# Altium PCB 变焦摄像头v2.0.PcbDoc
Units mil, origin at the board's own origin, x right, y up, seen from the top; angles counter-clockwise.
Board outline 1500 x 1500 mil, 2 copper layers (Top Layer, Bottom Layer); 28 components, 37 nets, 132 pads, 26 vias.
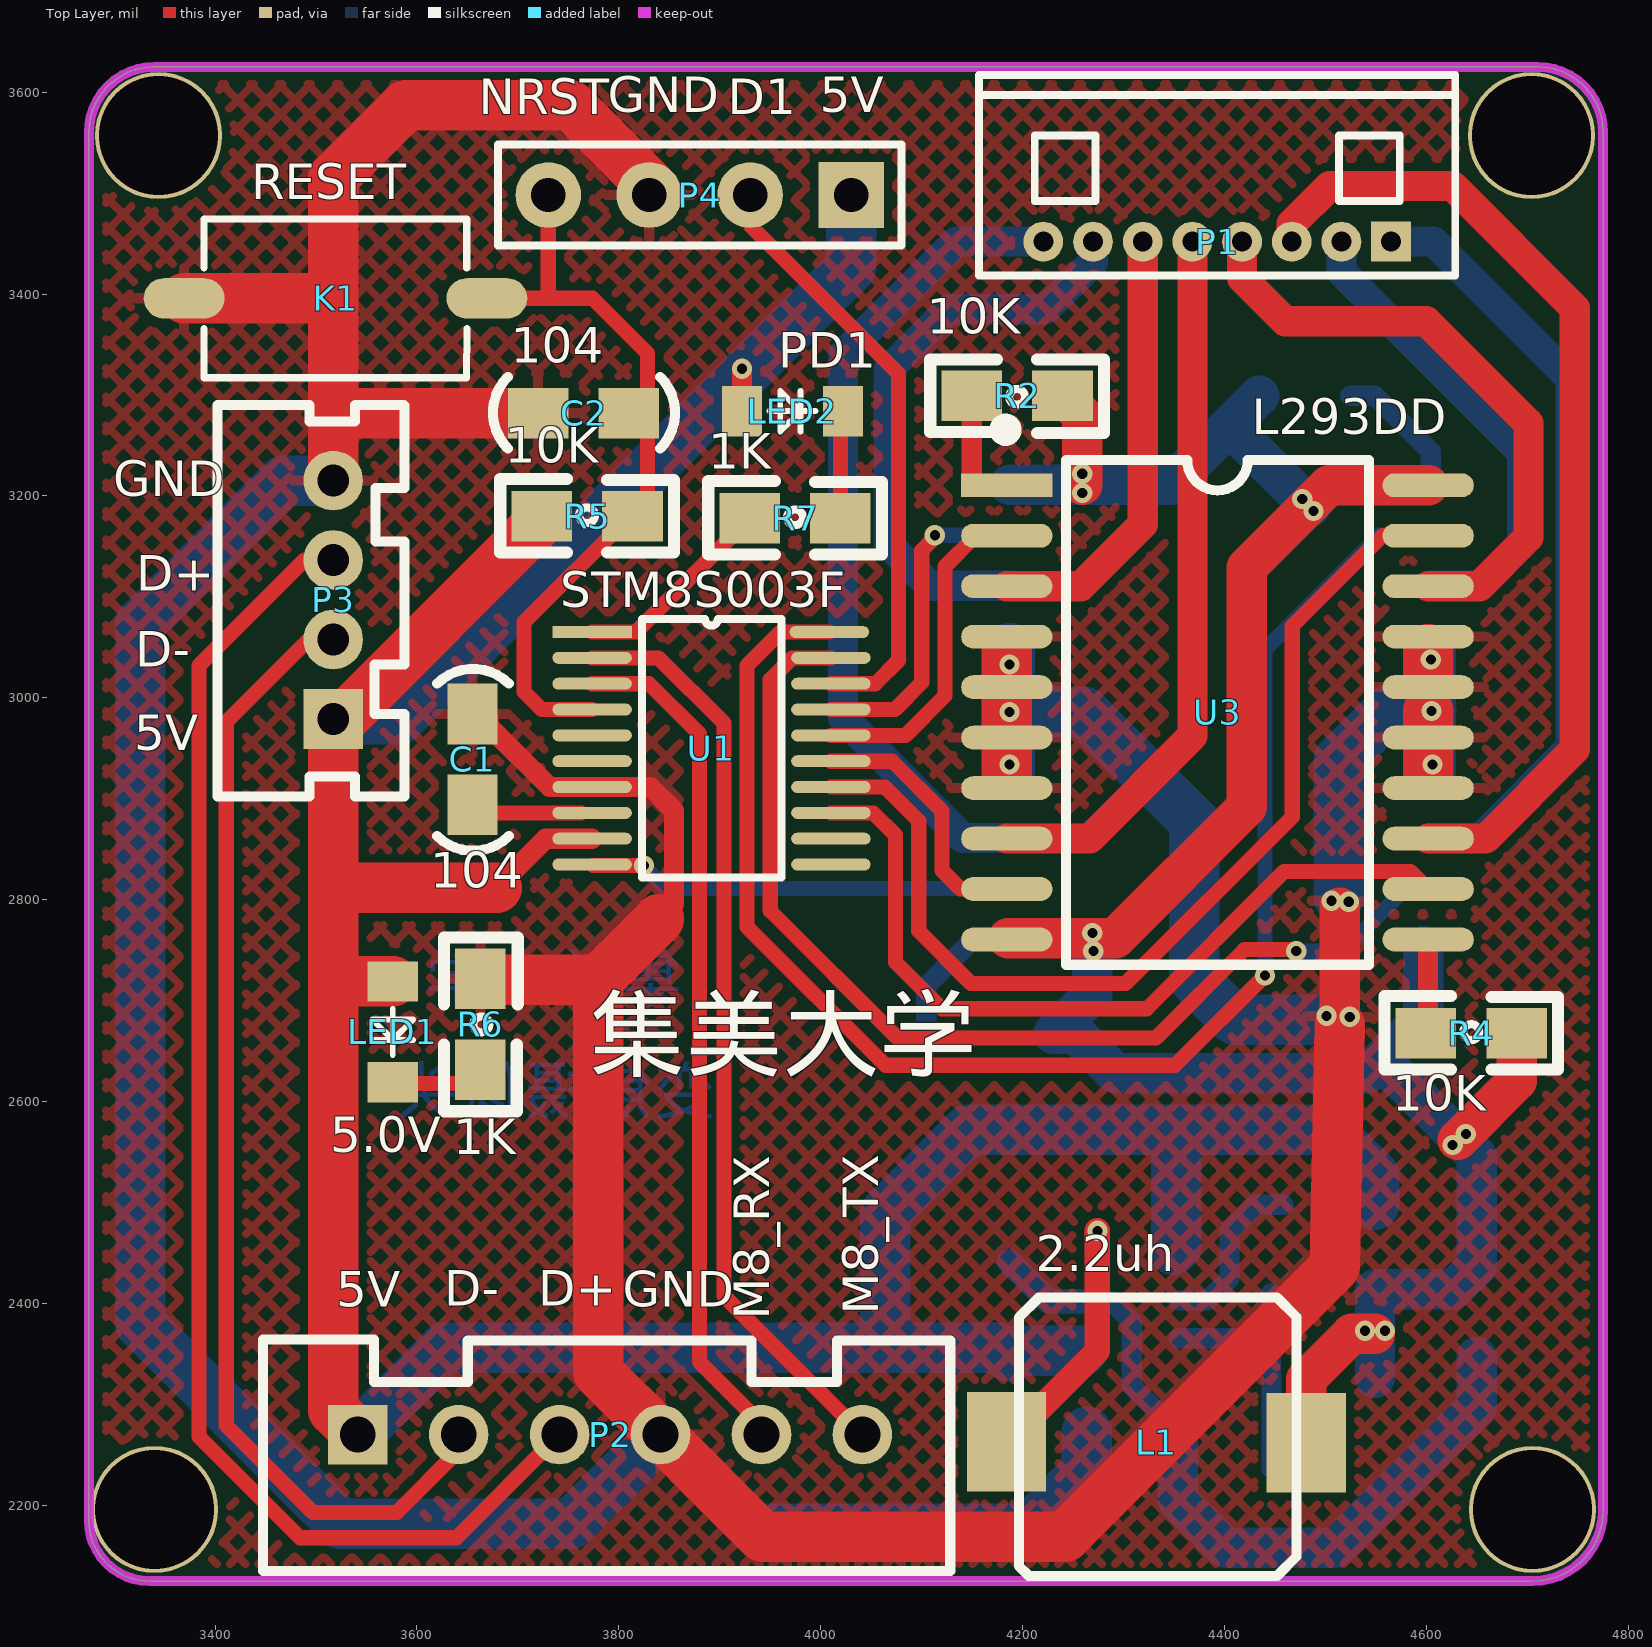
[diagram p0: Top Layer view]
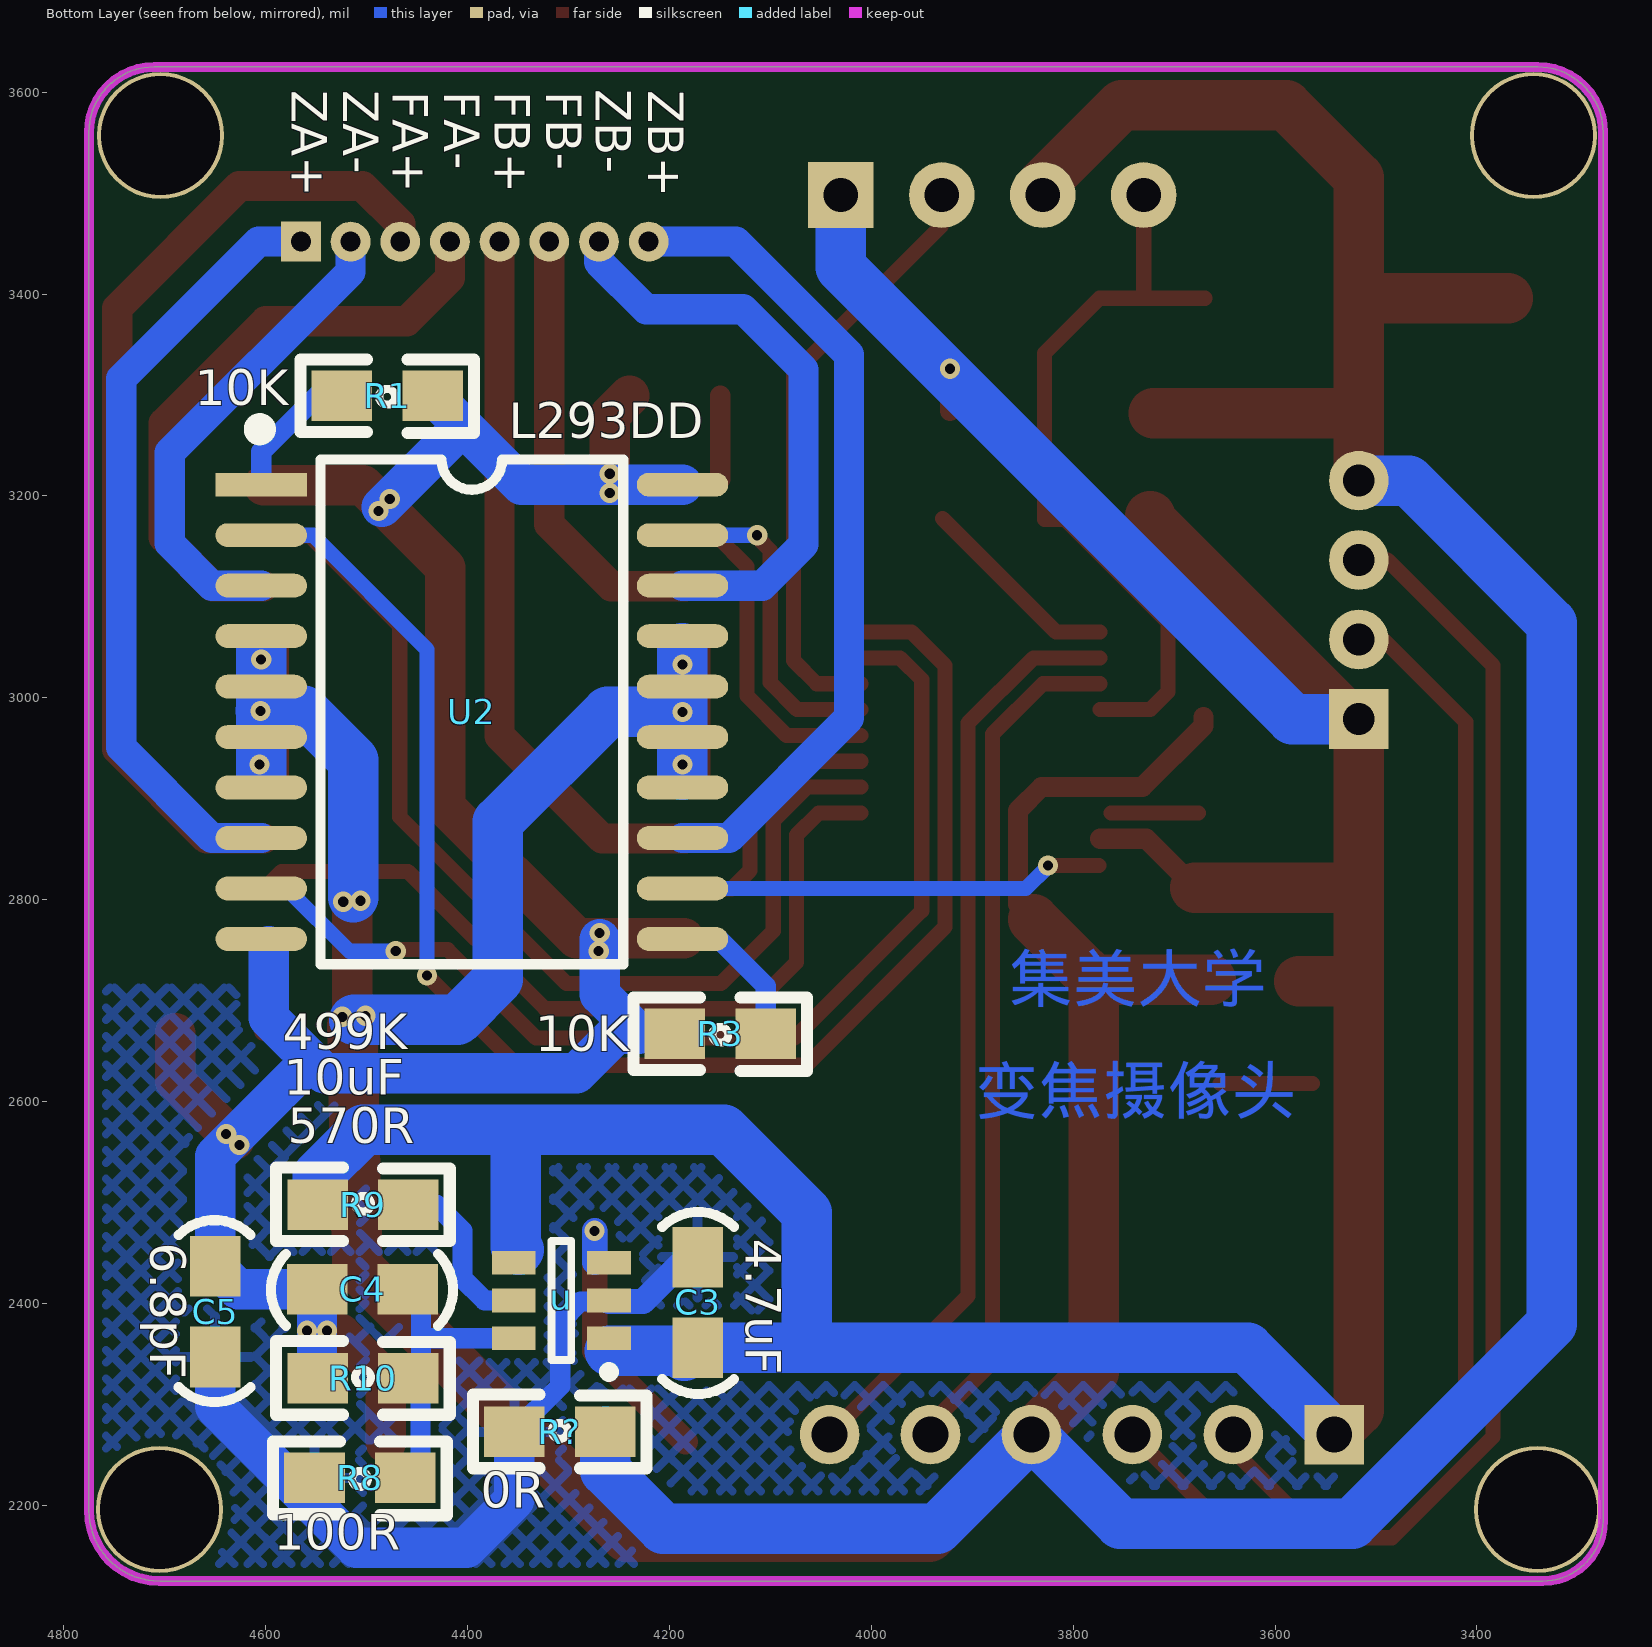
[diagram p1: Bottom Layer view, seen from below]
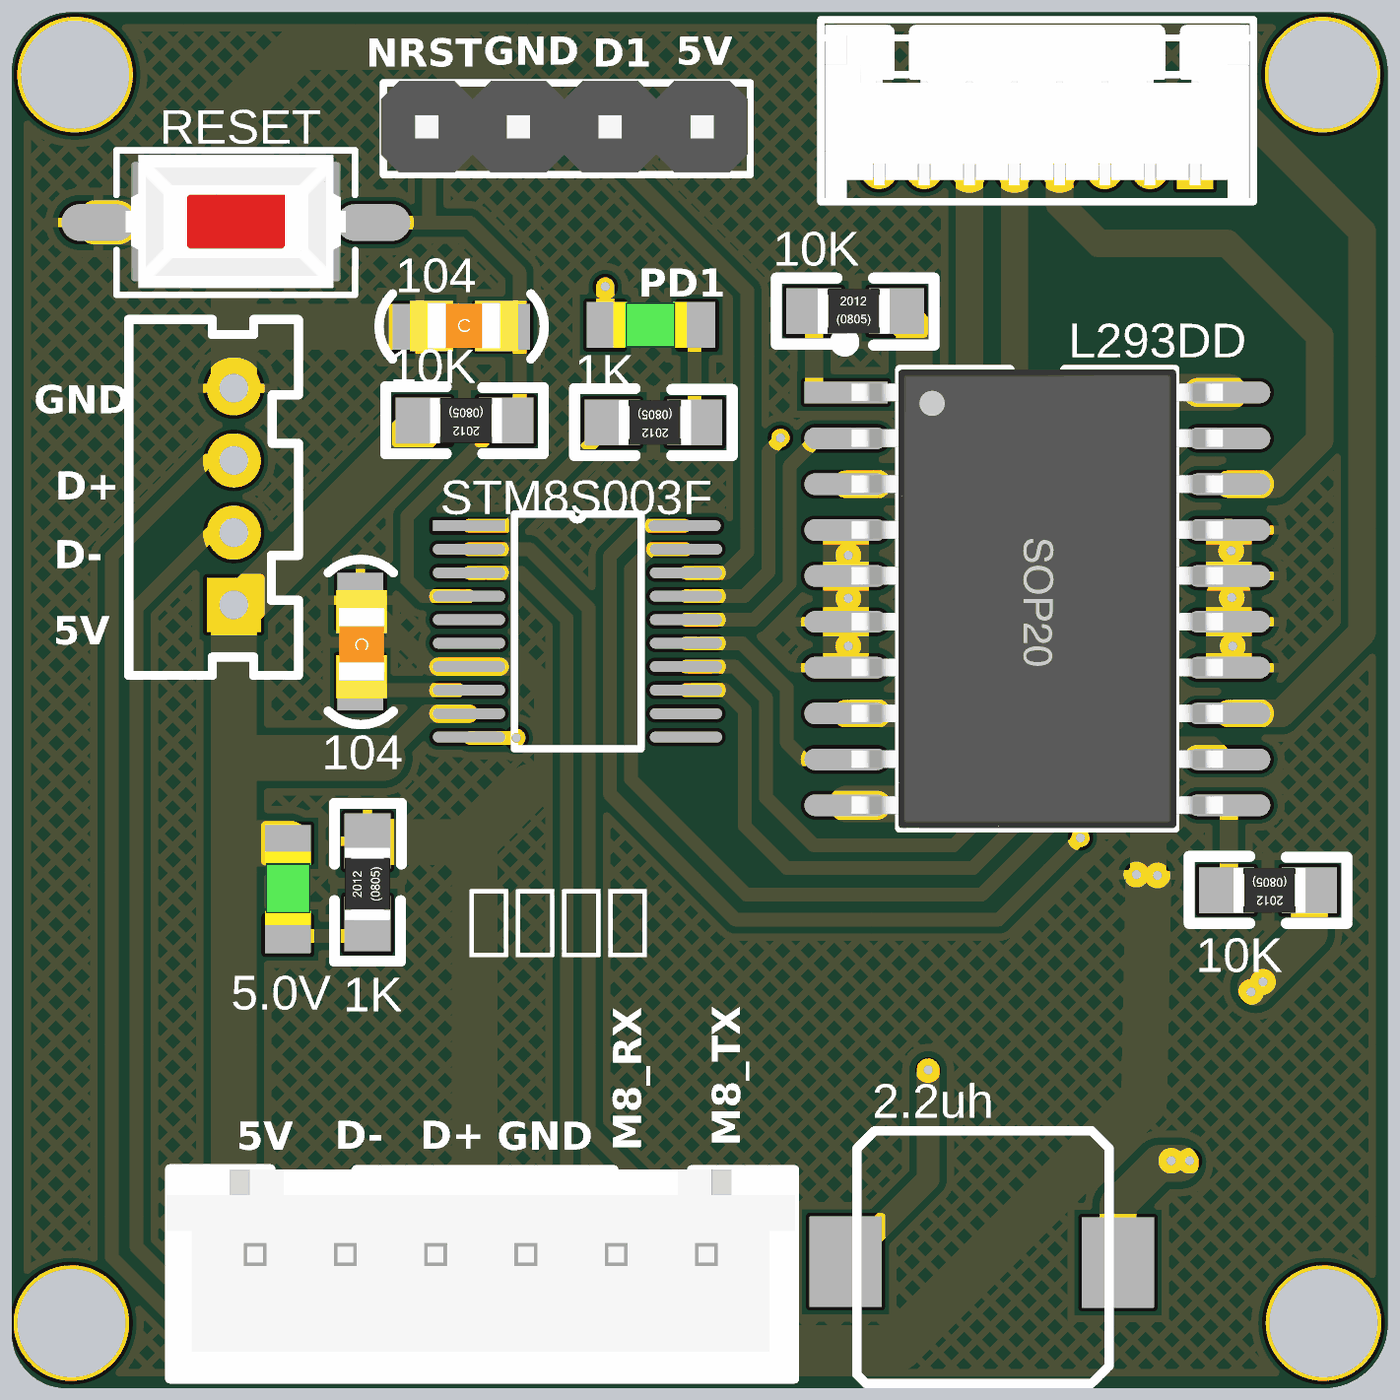
[diagram p2: 3D render of the assembled board from above, using the file's embedded part models]
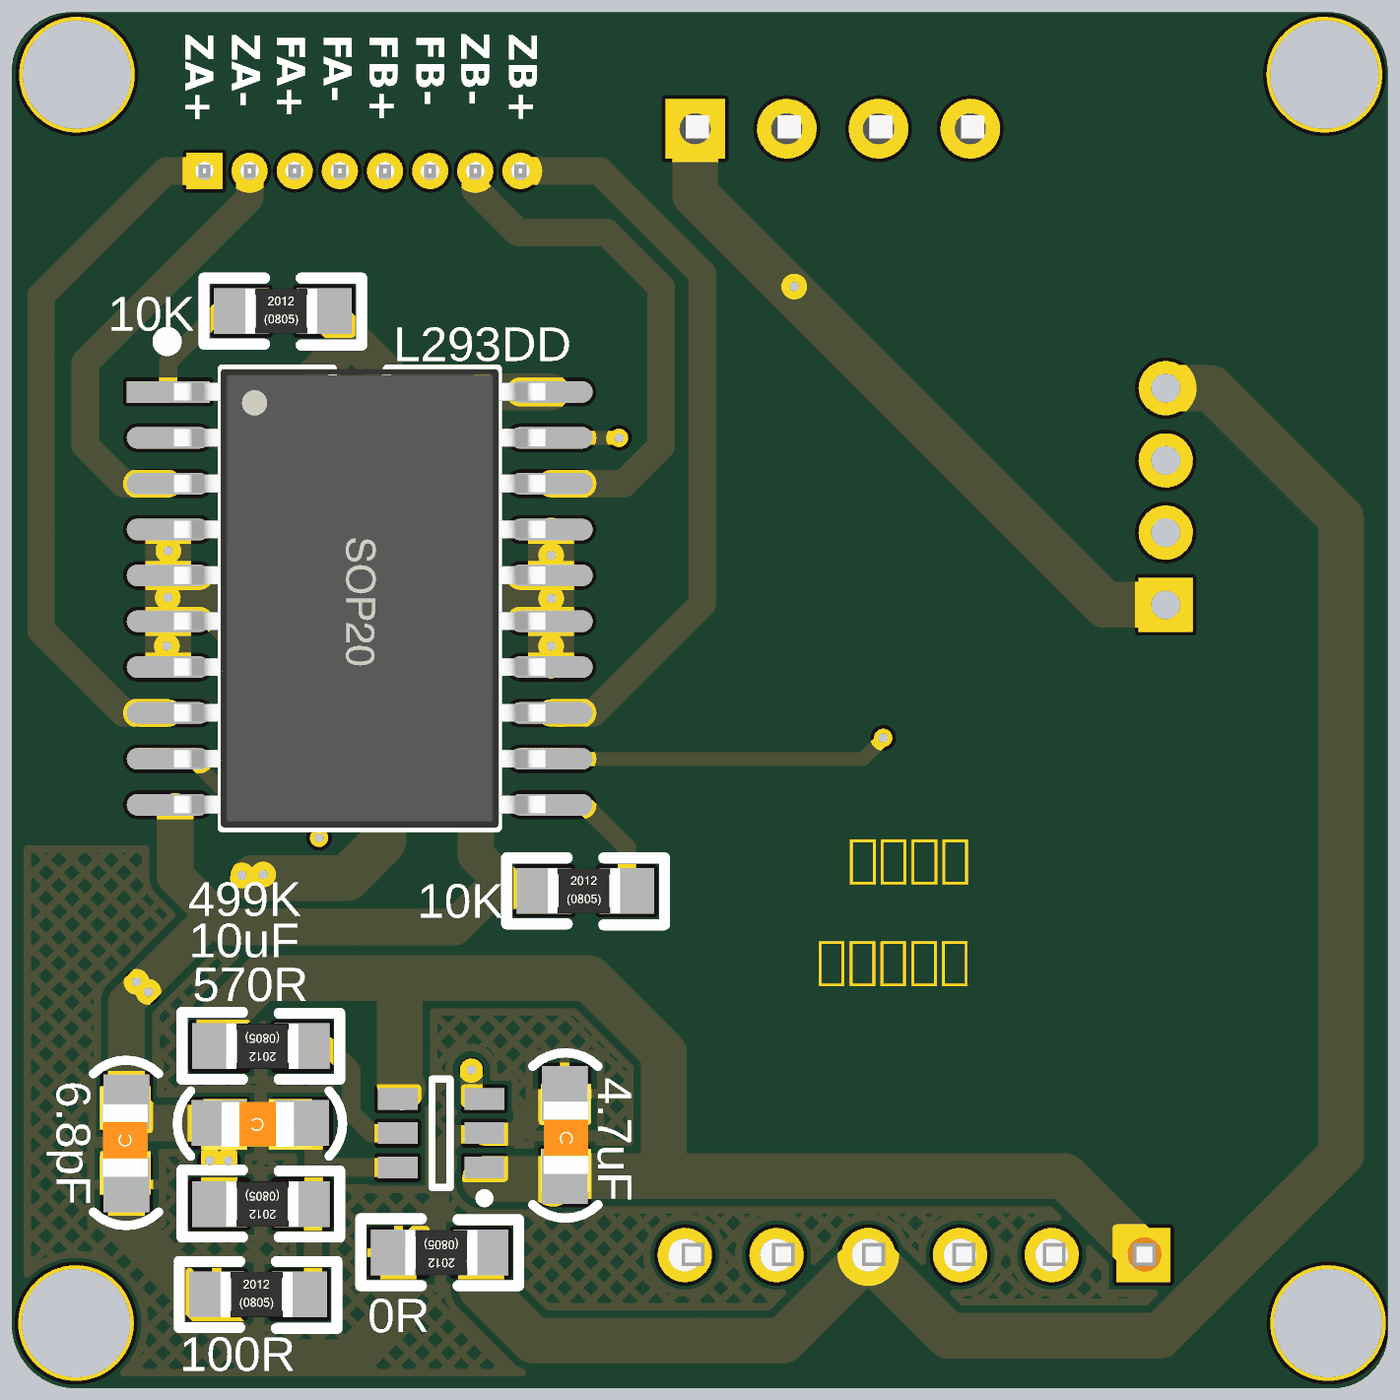
[diagram p3: 3D render of the assembled board from below, using the file's embedded part models]

## Layer stack, top to bottom
Top Solder: solder mask 0.4, Solder Resist, Dk 3.5
Top Layer: signal copper 1.4
Dielectric 1: dielectric 12.6, FR-4, Dk 4.8
Bottom Layer: signal copper 1.4
Bottom Solder: solder mask 0.4, Solder Resist, Dk 3.5

## Board outline
3275,2185 ccw(c3335,2185) 3335,2125 4705,2125 ccw(c4705,2195) 4775,2195 4775,3560 ccw(c4710,3560) 4710,3625 3340,3625 ccw(c3340,3560) 3275,3560

## Design rules (kind name [scope] priority, off if disabled: settings)
Clearance [All] p1: gap=8
PolygonConnect [All] p1: connectstyle=Relief reliefconductorwidth=10 reliefentries=4 polygonreliefangle="90 Angle" airgapwidth=10
RoutingVias [All] p1: holewidth=28 width=50 viastyle="Through Hole" minholewidth=28 minwidth=50 maxholewidth=28 maxwidth=50
SolderMaskExpansion [All] p1: expansion=4
Width [All] p1: maxlimit=100 minlimit=10 preferedwidth=15 minimp=50.000000 maximp=50.000000 favimp=50.000000
30 further rules are at their usual default settings.

## Components (designator, comment, footprint, x,y, rotation, side; value= is the part's Value field where it differs from the comment)
C1 "104" 0805c 3655,2979 r270 top
C2 "104" 0805c 3725,3282 r0 top
C3 "4.7uF" 0805C 4172,2441 r270 bottom
C4 "10uF" 0805C 4464,2414 r0 bottom
C5 "6.8pF" 0805C 4650,2352 r90 bottom
K1 "RESET" 贴片按键 3375,3393 r0 top
L1 "2.2uh" 电感（220uh） 4334,2268 r0 top
LED1 "5.0V" 0805LED 3578,2717 r270 top
LED2 "RED" 0805LED 3924,3286 r0 top
P1 "接线端子-8PIN" MX1.25MM-8P 4565,3450 r180 top
P2 "6PIN" XH2.54-6P 3542,2271 r0 top
P3 "4PIN" PH2.0-4 3517,2979 r90 top
P4 "下载口" "Header 4" 4031,3499 r270 top
R1 "10K" 0805R 4520,3298 r180 bottom
R2 "10K" 0805R 4154,3298 r0 top
R3 "10K" 0805R 4190,2666 r180 bottom
R4 "10K" 0805R 4685,2669 r180 top
R5 "10K" 0805R 3809,3181 r180 top
R6 "1K" 0805R 3664,2636 r90 top
R7 "1K" 0805R 4015,3179 r180 top
R8 "100R" 0805R 4547,2226 r180 bottom
R9 "499K" 0805R 4463,2499 r0 bottom
R10 "570R" 0805R 4463,2327 r0 bottom
R? "0R" 0805R 4268,2274 r0 bottom
u "TLV62568P" TSOT23-6 4261,2366 r0 bottom
U1 "STM8S003F" STM8_SOP20 3774,3065 r0 top
U2 "L293DD" SOP-20M 4601.69,3210.55 r180 bottom
U3 "L293DD" SOP-20M 4187,3210 r0 top

## Footprints (in the part's own frame and the unit in brackets; to place one, negate y for a bottom-side part, rotate by r counter-clockwise, add the part's x,y. Pads: shape width x height; smd on the part's side, far side on the other; paste and mask are expansions set on the pad)
0805c [mil]
  rect 60x50 smd: 1(-5,0) 2(85,0)
  silkscreen extent -50,-35 131,36, body extent -16,-26 102,29, height 37
0805C [mil]
  rect 60x50 smd: 1(-5,0) 2(85,0)
  silkscreen extent -50,-35 131,36, body extent -16,-26 102,29, height 37
0805LED [mil]
  rect 40x50 smd: 1(-2,-2) 2(98,-2)
  silkscreen extent 25,-22 71,18, body extent 7,-27 87,23, height 43
0805R [mil]
  rect 60x50 smd: 1(-4.51,1.2) 2(85.49,1.2)
  silkscreen extent -46,-36 126,37, body extent -1,-23 78,26, height 18
"Header 4" [mil]
  rect 65x65 hole 34: 1(0.95,-0.93)
  round 65 hole 34: 2(0.95,-100.93) 3(0.95,-200.93) 4(0.95,-300.93)
  silkscreen extent -49,-351 51,49, body extent -51,-354 49,46, height 336
MX1.25MM-8P [mm]
  rect 1x1 hole 0.5: 1(0,-0.05)
  round 1 hole 0.5: 2(1.25,-0.05) 3(2.5,-0.05) 4(3.75,-0.05) 5(5,-0.05) 6(6.25,-0.05) 7(7.5,-0.05) 8(8.75,-0.05)
  silkscreen extent -1.61,-4.24 10.36,0.8, body extent -1.5,-4.1 10.25,0.8, height 3.35
PH2.0-4 [mm]
  rect 1.5x1.5 hole 0.8: 1(0,0)
  round 1.5 hole 0.8: 2(2,0) 3(4,0) 4(6,0)
  silkscreen extent -1.95,-1.79 7.9,2.91
SOP-20M [mm]
  rect 2.3x0.6 smd: 1(-0.067,0.014)
  oval 2.3x0.6 smd: 2(-0.067,-1.256) 3(-0.067,-2.526) 4(-0.067,-3.796) 5(-0.067,-5.066) 6(-0.067,-6.336) 7(-0.067,-7.606) 8(-0.067,-8.876) 9(-0.067,-10.146) 10(-0.067,-11.416) 11(10.533,-11.416) 12(10.533,-10.146) 13(10.533,-8.876) 14(10.533,-7.606) 15(10.533,-6.336) 16(10.533,-5.066) 17(10.533,-3.796) 18(10.533,-2.526) 19(10.533,-1.256) 20(10.533,0.014)
  silkscreen extent -0.26,-12.05 9.04,1.57, body extent 0.08,-12.05 10.39,0.65, height 2.7
STM8_SOP20 [mm]
  rect 2x0.3 smd: 1(-0.014,0.005)
  oval 2x0.3 smd: 2(-0.014,-0.645) 3(-0.014,-1.295) 4(-0.014,-1.945) 5(-0.014,-2.595) 6(-0.014,-3.245) 7(-0.014,-3.895) 8(-0.014,-4.545) 9(-0.014,-5.195) 10(-0.014,-5.845) 11(5.994,-5.845) 12(5.994,-5.195) 13(5.994,-4.545) 14(5.994,-3.895) 15(5.994,-3.245) 16(5.994,-2.595) 17(5.994,-1.945) 18(5.994,-1.295) 19(5.994,-0.645) 20(5.955,0.005)
  silkscreen extent 1.24,-6.17 4.75,0.33, body extent -0.16,-6.27 6.12,0.23, height 1.1
TSOT23-6 [mm]
  rect 1.1x0.6 smd: 1(-0.032,0.01) 2(-0.032,-0.94) 3(-0.032,-1.89) 4(2.368,-1.89) 5(2.368,-0.94) 6(2.368,0.01)
  silkscreen extent -0.16,-2.44 1.42,0.99, body extent 0.29,-2.44 2.04,0.56, height 1.45
XH2.54-6P [mm]
  rect 1.5x1.5 hole 0.9: 1(-0.018,-0.022)
  round 1.5 hole 0.9: 2(2.522,-0.022) 3(5.062,-0.022) 4(7.602,-0.022) 5(10.142,-0.022) 6(12.682,-0.022)
  silkscreen extent -2.41,-3.45 14.89,2.37, body extent -2.5,-3.4 14.9,2.35, height 7
电感（220uh） [mm]
  rect 2x2.5 smd: 1(-3.81,-0.127) 2(3.734,-0.152)
  silkscreen extent -3.5,-3.5 3.48,3.5
贴片按键 [mil]
  oval 80x40 smd: 1(-5.71,2.8) 2(294.29,2.8)
  silkscreen extent 14,-76 274,82, body extent 24,-69 264,77, height 98

## Part data
C1 C2: library part "Cap Semi", "Capacitor (Semiconductor SIM Model)"
C3 C4 C5: library part Cap1, "无极贴片电容"
K1: library part K_Press, "贴片按键"
L1: library part "电感 220uh", "7*7*4"
LED1 LED2: library part LED, "发光二极管"
P2: library part 接线端子-6PIN
P3: library part 接线端子-4PIN
P4: library part "Header 4", "Header, 4-Pin"
R1 R2 R3 R4 R6 R7 R8 R9 R10 R?: library part Res, "电阻"
R5: library part Res2, "Resistor"
U1: library part Component_1
U2 U3: library part L293D

## Free pads (board coordinates)
  round 125.98 hole 118.11: 2(3340,2196) 2(3344,3557) 2(4704,3557) 2(4705,2196)

## Via types
v1: diameter 20, hole 10, Top Layer to Bottom Layer, 26 vias

## Nets (pads, with @x,y where several pads share a name; then routed paths per layer and width w, separated by ;. In a path a pad name is that pad's centre, name@x,y a point inside that pad or via, vN(x,y) a via of type N, cw(c..) or ccw(c..) an arc to the next point about the centre after c; other vN are vias at no path point)
4.0V: C4.2 C5.2 L1.2 R1.2 R2.2 R3.1 R4.1 R10.2 U2.10 U2.20 U3.10 U3.20 | length 2535.6
  Top Layer w40: U3.10@4185.81,2762 4288,2762 ; R2.2 4259,3279.69 v1@4259,3211 ; 4292,2762 4422,2892 4422,3129 4503.55,3210.55 U3.20 ; L1.2 4481,2325 4526.15,2370.15 4549,2370.15 ; v1@4631,2562 4689.51,2620.51 R4.1
  Bottom Layer w40: U2.20 4346.41,3211.1 R1.2 ; v1@4269,2761 4269,2706.2 4230,2667.2 4252.8,2667.2 4292,2628 4542,2628 4597,2683 U2.10@4597,2753.78 ; 4406.65,3267.35 v1@4485,3189 ; R10.2@4549,2326.31 C4.2 4627,2414 C5.2 4650,2546 4555,2641
  other v1: 4539,2373 4559,2373 4626,2557 4639,2568 4270,2749 4269,2767 4488,3185 4477,3197 4259,3203 4259,3222
5.0V: C3.2 LED1.1 LED2.1 P2.1 P3.1 P4.1 R5.2 R9.2 U1.9 u.1 u.4 | length 3724.6
  Top Layer w20: 3679,2812 3727.46,2860.46 U1.9 ; LED2.1 v1(3922,3326)
  Top Layer w50: 3518,2719 LED1.1 ; P2.1 3517,2294.42 3517,2812 ; 3679,2812 3517,2812 ; R5.2 3723.51,3175.82 3526.69,2979 P3.1 3517,2812
  Bottom Layer w50: P3.1@3526.69,2979 3582.72,2979 4030.07,3426.36 P4.1 ; P2.1 3627.13,2356 4064,2356 ; C3.2@4185,2348 4177,2356 C3.2 4064,2356 ; C3.2@4185,2353 4259,2353 ; 4349,2453.06 4352,2456.06 4352,2572 ; R9.2 4548.49,2526.51 4503,2572 4352,2572 ; 4064,2356 4064,2490 4146,2572 4352,2572
AGND: C3.1 C5.1 R8.1 R?.2 u.2 | length 764
  Bottom Layer w20: u.2@4259.76,2402 4288,2402 4308,2382 4308,2318.28 R?.2
  Bottom Layer w25: C3.1@4187,2441 4226,2402 u.2@4259.76,2402
  Bottom Layer w40: R?.2 4353.49,2205.51 4401,2158 4510,2158 4650,2298 C5.1
"CAMERA USB_D+": P2.3 P3.3 | length 1381.3
  Top Layer w15: P3.3 3488.48,3136.48 3384,3032 3384,2268 3484,2168 3639.13,2168 P2.3
"CAMERA USB_D-": P2.2 P3.2 | length 1144
  Top Layer w15: P3.2 3492.74,3057.74 3411,2976 3411,2279 3497,2193 3580,2193 3641.28,2254.28 P2.2
D1: P4.2 U1.18 | length 598
  Top Layer w15: P4.2@3931.07,3498.05 3931.07,3466.93 4077,3321 4077,3037 4054,3014 U1.18
D4: R7.2 U1.1 | length 202.7
  Top Layer w15: U1.1 3816.9,3065.18 R7.2
FOCUS_A+: P1.3 U3.13 | length 982.6
  Top Layer w30: P1.3 4466.57,3469.57 4504,3507 4626,3507 4747,3386 4747,2949 4658.55,2860.55 U3.13
FOCUS_A-: P1.4 U3.18 | length 611.7
  Top Layer w30: P1.4 4417.36,3415.81 4460.17,3373 4600,3373 4701,3272 4701,3159 4652.55,3110.55 U3.18
FOCUS_B+: P1.5 U3.8 | length 715.7
  Top Layer w30: U3.8 4266.55,2860.55 4368.15,2962.15 P1.5
FOCUS_B-: P1.6 U3.3 | length 440
  Top Layer w30: U3.3 4257.55,3110.55 4318.94,3171.94 P1.6
GND: C1.1 C2.1 K1.1 P2.4 P3.4 P4.3 R6.2 R?.1 U1.7 U2.4 U2.5 U2.6 U2.7 U2.14 U2.15 U2.16 U2.17 U3.4 U3.5 U3.6 U3.7 U3.14 U3.15 U3.16 U3.17 | length 6587.3
  Top Layer w20: C1.1@3671,2981 3671,2972 3731.36,2911.64 U1.7 3831.36,2911.64 3854.5,2888.5 3854.5,2795.5 3839.5,2780.5 ; 3779.49,2720.49 3788.5,2729.5
  Top Layer w40: 4514,2675 4514,2792.3
  Top Layer w50: K1.1 3515.8,3395.8 ; P3.4 3517,3282 ; R6.2@3663.8,2720.49 3779.49,2720.49 3779.49,2331.93 P2.4 3942.42,2169 4242,2169 4509.22,2436.22 4514,2675 ; C2.1 3517,3282 ; 3788.5,2729.5 3839.5,2780.5 ; P4.3 3830.07,3508.93 3752,3587 3589,3587 3517,3515 3517,3282 ; v1@4184.36,2927 U3.6 U3.5 4184.36,3047 ; 4601.69,2925 U3.15 v1@4601.69,2987 ; U3.16 4601.69,3048
  Bottom Layer w50: P3.4 3467.53,3215.22 3326,3073.69 3326,2379.69 3523.69,2182 3753.13,2182 P2.4 3934.42,2177 4206,2177 4263.49,2234.49 R?.1 ; 4187,2924 v1(4187,2934) U2.15 v1(4187,2986.1) ; 4187,3049 v1(4187,3033) U2.16 v1(4187,2986.1) ; 4512,2681 4410,2681 4370,2721 4370,2877 4260.9,2986.1 v1(4187,2986.1) ; v1@4513,2802.28 4513,2938 4562,2987 v1(4605,2987) ; v1@4604.32,2925 U2.5 v1(4604.32,3038) v1@4604.32,3047
  other v1: 4524,2684 4501,2685 4523,2798 4506,2799 4606,2934
IN1: U1.19 U2.9 | length 1067
  Top Layer w15: U1.19 3971.59,3039.59 3950,3018 3950,2789 4076,2663 4332,2663 4419.5,2750.5 4469.5,2750.5 v1(4471,2749)
  Bottom Layer w15: v1(4471,2749) 4517,2749 4579.1,2811.1 U2.9
IN2: U1.20 U2.2 | length 1495
  Top Layer w15: U1.20 3960.18,3065.18 3927,3032 3927,2773 4064,2636 4351,2636 v1(4440,2725)
  Bottom Layer w15: v1(4440,2725) 4440,3048 4553.1,3161.1 U2.2
IN3: U1.17 U2.19 | length 319.8
  Top Layer w15: U1.17 4073.41,2988.41 4100,3015 4100,3146 v1@4109.74,3155.74
  Bottom Layer w15: v1(4113,3161) 4113.1,3161.1 U2.19
IN4: U1.10 U2.12 | length 406.7
  Top Layer w15: U1.10@3774.33,2834 v1(3825,2834)
  Bottom Layer w15: v1(3825,2834) 3825,2833 3847,2811 U2.12@4170.9,2811
IN5: U1.13 U3.12 | length 809.4
  Top Layer w15: U1.13 4051.95,2886.05 4074,2864 4074,2738 4120,2692 4323,2692 4459,2828 4584.23,2828 U3.12
IN6: U1.14 U3.19 | length 1030.6
  Top Layer w15: U1.14 4063.36,2911.64 4097,2878 4097,2769 4149,2717 4302,2717 4467,2882 4467,3071 4556.55,3160.55 U3.19
IN7: U1.15 U3.9 | length 261.4
  Top Layer w15: U1.15 4070.77,2937.23 4120,2888 4120,2829 4138.45,2810.55 U3.9
IN8: U1.16 U3.2 | length 331.2
  Top Layer w15: U1.16 4083.82,2962.82 4123,3002 4123,3130 4153.55,3160.55 U3.2
NetC1_2: C1.2 U1.8 | length 86.5
  Top Layer w15: C1.2@3675.95,2886.05 U1.8@3762.46,2886.05
NetC4_1: C4.1 R8.2 R10.1 u.6 | length 258.4
  Bottom Layer w20: u.6 4442.4,2365.6 ; R10.1@4446,2332.28 C4.1@4446,2410 ; R8.2@4446.49,2236.23 R10.1@4446.49,2328.8
NetL1_1: L1.1 u.3 | length 277.6
  Top Layer w25: L1.1 4274,2353 v1(4274,2472)
  Bottom Layer w25: u.3@4274,2440.65 v1(4274,2472)
NetLED1_2: LED1.2 R6.1 | length 91.3
  Top Layer w15: LED1.2@3563,2618 R6.1@3654.31,2618
NetLED2_2: LED2.2 R7.1 | length 103.7
  Top Layer w15: R7.1 LED2.2@4019.51,3281.51
NetR1_1: R1.1 U2.1 | length 135.4
  Bottom Layer w20: R1.1 4548.8,3299.2 4604.32,3243.68 U2.1
NetR2_1: R2.1 U3.1 | length 120
  Top Layer w20: R2.1 4149.49,3216.51 4155.45,3210.55 U3.1
NetR3_2: R3.2 U2.11 | length 149.1
  Bottom Layer w20: R3.2 4104.51,2714.51 4151.1,2761.1 U2.11
NetR4_2: R4.2 U3.11 | length 93.7
  Top Layer w15: R4.2 R4.2@4601.69,2669.97
  Top Layer w20: R4.2@4601.69,2669.97 U3.11
NetR9_1: R9.1 u.5 | length 171
  Bottom Layer w20: u.5 4383,2403 4405,2425 4405,2472 4430.8,2497.8 R9.1
NRST: C2.2 K1.2 P4.4 R5.1 U1.4 | length 757
  Top Layer w15: K1.2 3730.07,3395.8 ; P4.4 3730.07,3395.8 ; U1.4 3723.59,2988.41 3706,3006 3706,3075 3807.8,3176.8 3828.51,3176.8 3828.51,3341.28 3774,3395.8 3730.07,3395.8
STM8_RX: P2.5 U1.3 | length 846.5
  Top Layer w15: U1.3 3830,3014 3880,2964 3880,2342 3941.28,2280.72 P2.5
STM8_TX: P2.6 U1.2 | length 919
  Top Layer w15: U1.2 3839.41,3039.59 3904,2975 3904,2407.42 P2.6
ZOOM_A+: P1.1 U2.8 | length 775.2
  Bottom Layer w30: P1.1 4607.03,3451.97 4743,3316 4743,2951 4653.1,2861.1 U2.8
ZOOM_A-: P1.2 U2.3 | length 481.2
  Bottom Layer w30: P1.2 4515.79,3422.21 4695,3243 4695,3153 4653.1,3111.1 U2.3
ZOOM_B+: P1.8 U2.13 | length 819.1
  Bottom Layer w30: U2.13 4140.9,2861.1 4022,2980 4022,3340 4133.97,3451.97 P1.8
ZOOM_B-: P1.7 U2.18 | length 577.1
  Bottom Layer w30: U2.18 4107.9,3111.1 4067,3152 4067,3325 4127,3385 4223,3385 4269.72,3431.72 P1.7
pads on no net: U1.5 U1.6 U1.11 U1.12

## Polygon pours and split planes (outlines as drawn)
AGND on Bottom Layer "Bottom Layer-No Net" (hatched 45Degree grid 20 track 8, remove dead copper, pour order 24): 3146,2736 3169,2713 4945,2713 4945,2062 4893,2010 4879,1996 3623,1996 3270,1996 3238,2028 3151,2115 3151,2727
GND on Top Layer "Bottom Layer-No Net" (hatched 45Degree grid 20 track 8, remove dead copper, pour order 26): 3254,3691 3271,3708 4789,3708 4789,2132 4737,2080 4728,2071 3239,2071 3239,3687 3241,3689 3262,3710 3267,3710

## Keep-outs
Keep-Out Layer:
  the board outline again, w10

## Other copper
Bottom Layer:
  text "集美大学" at 3864,2684 h80
  text "变焦摄像头" at 3898,2573 h80

## Silkscreen, mask and mechanical layers (free items; w line width, h text height)
Top Overlay:
  text "GND" at 3789,3568 h60
  text "5V" at 3999,3568 h60
  text "NRST" at 3661,3566 h60
  text "D1" at 3908,3566 h60
  text "PD1" at 3958,3315 h60
  text "GND" at 3299,3188 h60
  text "D+" at 3322,3094 h60
  text "D-" at 3321,3019 h60
  text "5V" at 3320,2936 h60
  text "集美大学" at 3770,2610 h120
  text "M8_TX" at 4069,2389 h60 r90
  text "D-" at 3627,2386 h60
  text "D+" at 3720,2386 h60
  text "5V" at 3520,2385 h60
  text "GND" at 3804,2385 h60
  text "M8_RX" at 3961,2384 h60 r90
Bottom Overlay:
  text "ZB-" at 4285,3603 h60 r90
  text "ZB+" at 4233,3602 h60 r90
  text "ZA-" at 4535,3602 h60 r90
  text "ZA+" at 4586,3602 h60 r90
  text "FB-" at 4334,3601 h60 r90
  text "FB+" at 4385,3601 h60 r90
  text "FA-" at 4435,3601 h60 r90
  text "FA+" at 4486,3601 h60 r90
Bottom Solder:
  text "集美大学" at 3864,2684 h80
  text "变焦摄像头" at 3898,2573 h80